# Altium PCB HFM_Can_AX_Eeprom_V1.PcbDoc
Units mil, origin at the board's own origin, x right, y up, seen from the top; angles counter-clockwise.
Board outline 998 x 700 mil, 2 copper layers (Top Layer, Bottom Layer); 15 components, 15 nets, 61 pads, 12 vias.
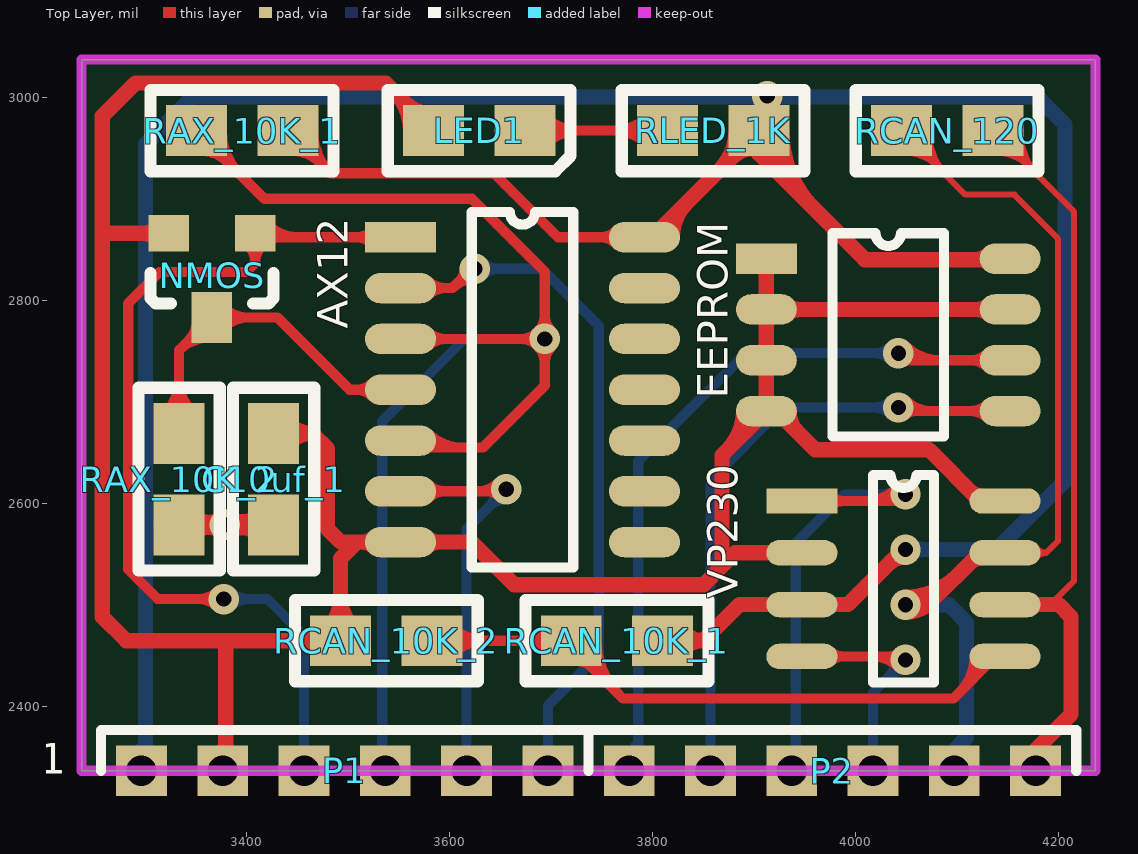
[diagram p0: Top Layer view]
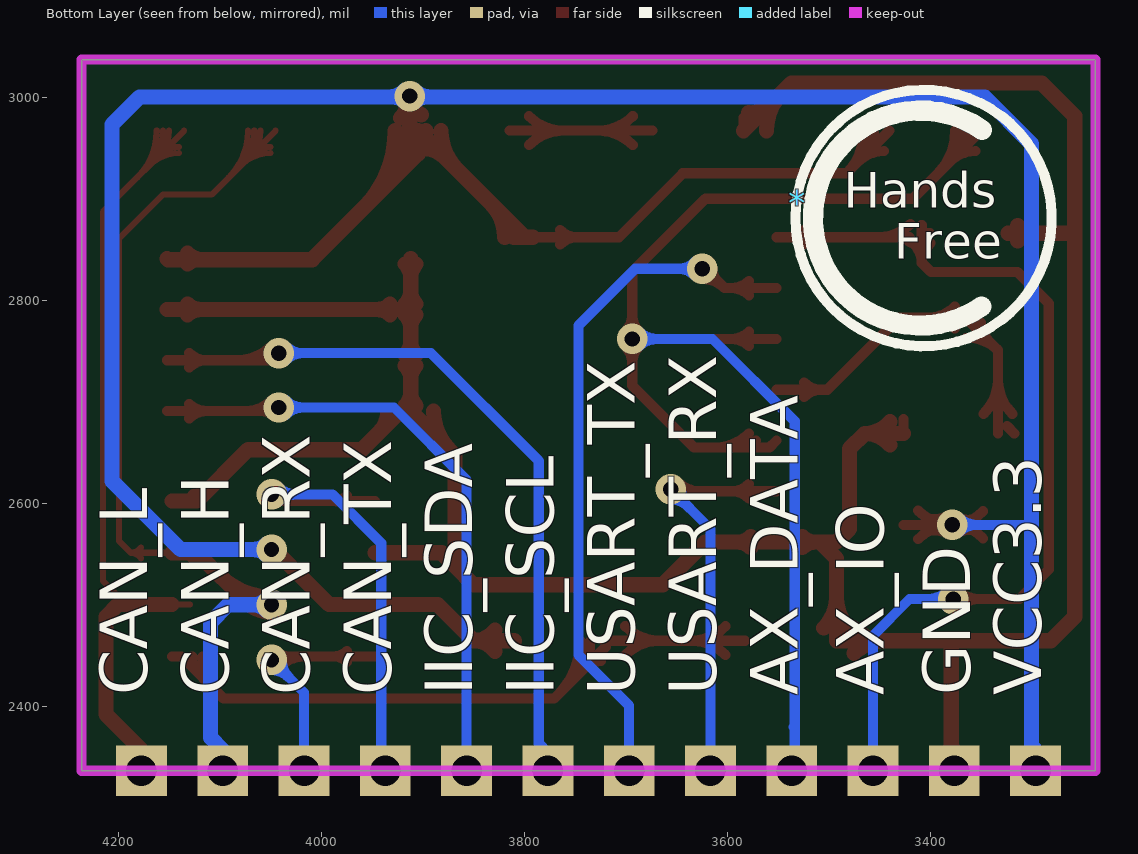
[diagram p1: Bottom Layer view, seen from below]

## Layer stack, top to bottom
Top Layer: signal copper 1.4
Dielectric: dielectric 12.6, FR-4, Dk 4.8
Bottom Layer: signal copper 1.4

## Board outline
3238,2337 4236,2337 4236,3037 3238,3037

## Design rules (kind name [scope] priority, off if disabled: settings)
Clearance [All] p1: gap=8
ComponentClearance [All] p1 off: gap=10 collisioncheckmode=3 verticalgap=10 showdistances=FALSE
Height [All] p1 off: minheight=0 maxheight=1000 prefheight=500
PolygonConnect [All] p1: connectstyle=Relief reliefconductorwidth=10 reliefentries=4 polygonreliefangle="90 Angle"
RoutingVias [All] p1: holewidth=15 width=30 viastyle="Through Hole" minholewidth=15 minwidth=30 maxholewidth=100 maxwidth=200
SilkscreenOverComponentPads [All] p1: minsilkscreentomaskgap=10
SolderMaskExpansion [All] p1: expansion=4
Width [All] p1: maxlimit=100 minlimit=6 preferedwidth=6
25 further rules are at their usual default settings.

## Components (designator, comment, footprint, x,y, rotation, side; value= is the part's Value field where it differs from the comment)
* "MDE_LOGO" MDE_LOGO_Overlay 3531,2896 r180 bottom
AX12 "CHP_74HC126D" CHP_SOP_14P 3552,2862 r0 top
C10uf_1 "ELE_Cap_10uf" ELE_0805_P 3427,2579 r90 top
EEPROM "AT24C02" CHP_SOP_8P 3912,2841 r0 top
LED1 "ELE_LED" ELE_0805极性_P 3674.33,2967 r180 top
NMOS "SIS412DN" CHP_SOT23_P_3P 3409,2866 r180 top
P1 "HDR_Header_1*6" HDR_STAMPHOLE_2.00_DH_1*6 3697,2337 r180 top
P2 "HDR_Header_1*6" HDR_STAMPHOLE_2.00_DH_1*6 4177,2337 r180 top
RAX_10K_1 "Res2" ELE_0805_P 3351,2967 r0 top
RAX_10K_2 "ELE_RES_1" ELE_0805_P 3334,2579 r90 top
RCAN_10K_1 "ELE_RES_1" ELE_0805_P 3810,2465 r180 top
RCAN_10K_2 "ELE_RES_1" ELE_0805_P 3583,2465 r180 top
RCAN_120 "ELE_RES_1" ELE_0805_P 4045,2967 r0 top
RLED_1K "ELE_RES_1" ELE_0805_P 3814.67,2967 r0 top
VP230 "CHP_VP230_P" CHP_VP230_P 3947,2602.5 r0 top

## Footprints (in the part's own frame and the unit in brackets; to place one, negate y for a bottom-side part, rotate by r counter-clockwise, add the part's x,y. Pads: shape width x height; smd on the part's side, far side on the other; paste and mask are expansions set on the pad)
CHP_SOP_8P [mil]
  rect 60x30 smd: 1(0,0)
  oval 60x30 smd: 2(0,-50) 3(0,-100) 4(0,-150) 5(240,-150) 6(240,-100) 7(240,-50) 8(240,0)
  silkscreen extent 65,-175 175,25
CHP_SOP_14P [mil]
  rect 70x30 smd: 1(0,0)
  oval 70x30 smd: 2(0,-50) 3(0,-100) 4(0,-150) 5(0,-200) 6(0,-250) 7(0,-300) 8(240,-300) 9(240,-250) 10(240,-200) 11(240,-150) 12(240,-100) 13(240,-50) 14(240,0)
  silkscreen extent 70,-325 170,25
CHP_SOT23_P_3P [mil]
  rect 40x36 smd: 1(0,0) 2(85,0)
  rect 40x50 smd: 3(43,83)
  silkscreen extent -18,39 103,69
CHP_VP230_P [mil]
  rect 70x25 smd: 1(0,0)
  oval 70x25 smd: 2(0,-51) 3(0,-102) 4(0,-153) 5(200,-153) 6(200,-102) 7(200,-51) 8(200,0)
  silkscreen extent 70,-178 130,26
ELE_0805_P [mil]
  rect 60x50 smd: 1(0,0) 2(90,0)
  silkscreen extent -45,-40 135,40
ELE_0805极性_P [mil]
  rect 60x50 smd: 1(0,0) 2(90,0)
  silkscreen extent -45,-40 135,40
HDR_STAMPHOLE_2.00_DH_1*6 [mil]
  rect 50x50 hole 30: 1(0,0) 2(80,0) 3(160,0) 4(240,0) 5(320,0) 6(400,0)
  Keep-Out Layer lines w10: 440,0 -40,0
  silkscreen extent -40,-40 440,0
MDE_LOGO_Overlay [mil]
  silkscreen extent -2,-141 250,111

## Part data
AX12: "4Â·ÈýÌ"
C10uf_1: "电容10uf"
EEPROM: library part CHP_AT24C0X, "Polarized Capacitor (Radial)"
LED1: "·"
NMOS: library part ELE_NMOS_1, "MOS管"
RAX_10K_1: "Resistor"
RAX_10K_2 RCAN_10K_1 RCAN_10K_2 RCAN_120 RLED_1K: "电?"

## Via types
v1: diameter 30, hole 15, Top Layer to Bottom Layer, 12 vias

## Nets (pads, with @x,y where several pads share a name; then routed paths per layer and width w, separated by ;. In a path a pad name is that pad's centre, name@x,y a point inside that pad or via, vN(x,y) a via of type N, cw(c..) or ccw(c..) an arc to the next point about the centre after c; other vN are vias at no path point)
AX_DATA: AX12.3 AX12.5 P1.3 RAX_10K_1.1 | length 1723.8
  Top Layer w10: RAX_10K_1.1@3348,2964 RAX_10K_1.1 3418,2900 3622,2900 3694,2828 v1(3694,2762) ; RAX_10K_1.1@3356,2947 cw(c3356,2910.79) 3381.61,2936.39 ; RAX_10K_1.1@3366,2967 ccw(c3402.21,2967) 3376.61,2941.39 ; RAX_10K_1.1@3376,2967 ccw(c3436.36,2967) 3393.68,2924.32 ; AX12.5 3559,2655 3633,2655 3694,2716 v1(3694,2762) ; AX12.3 v1(3694,2762) ; AX12.5@3572,2662 ccw(c3588.9,2678.9) 3588.9,2655 ; AX12.5@3579.07,2669.07 ccw(c3613.04,2703.04) 3613.04,2655 ; AX12.3@3579.07,2754.93 cw(c3596.14,2737.86) 3596.14,2762 cw(c3596.14,2786.14) AX12.3@3579.07,2769.07 ; v1@3701.07,2754.93 ccw(c3718.14,2737.86) 3694,2737.86 ccw(c3669.86,2737.86) 3686.93,2754.93 ccw(c3669.86,2737.86) 3669.86,2762 ccw(c3669.86,2786.14) 3686.93,2769.07 ccw(c3669.86,2786.14) 3694,2786.14 ccw(c3718.14,2786.14) v1@3701.07,2769.07
  Bottom Layer w10: P1.3@3534,2354 P1.3@3537,2351 ; 3535,2380 3534,2381 ; P1.3 3537,2355 3534,2358 3534,2381 ; v1@3686.93,2754.93 ccw(c3669.86,2737.86) 3669.86,2762 ccw(c3669.86,2786.14) v1@3686.93,2769.07 ; v1(3694,2762) 3615,2762 3534,2681 3534,2381
AX_IO: AX12.1 NMOS.1 P1.4 | length 1101.1
  Top Layer w10: v1@3370.93,2498.93 ccw(c3353.86,2481.86) 3353.86,2506 ccw(c3353.86,2530.14) v1@3370.93,2513.07 ; v1(3378,2506) 3313,2506 3284,2535 3284,2797 3315,2828 3400,2828 3409,2837 ; NMOS.1@3400.35,2856.29 cw(c3383.16,2837) 3409,2837 ; NMOS.1@3401,2866 NMOS.1 ; NMOS.1@3409,2874 3409,2837 ; NMOS.1@3417.65,2856.29 ccw(c3434.84,2837) 3409,2837 ; NMOS.1@3420.19,2856.81 cw(c3432.73,2844.27) 3432.73,2862 ; NMOS.1@3420.19,2875.19 ccw(c3452.04,2907.04) 3452.04,2862 ; NMOS.1@3421,2862 AX12.1 ; AX12.1@3524.93,2854.93 ccw(c3507.86,2837.86) 3507.86,2862 ccw(c3507.86,2886.14) AX12.1@3524.93,2869.07
  Bottom Layer w10: v1(3378,2506) 3421,2506 3457,2470 P1.4@3457,2355 ; v1@3385.07,2498.93 cw(c3402.14,2481.86) 3402.14,2506 cw(c3402.14,2530.14) v1@3385.07,2513.07
CAN_H: P2.2 RCAN_120.1 VP230.7 | length 1220.8
  Top Layer w6: RCAN_120.1 4108,2904 4156,2904 4199,2861 4199,2563 4187.5,2551.5 ; RCAN_120.1@4050,2945 cw(c4050,2903.96) 4079.02,2932.98 ; RCAN_120.1@4050,2951 cw(c4050,2924.44) RCAN_120.1@4068.78,2943.22 ; RCAN_120.1@4060,2967 ccw(c4096.21,2967) 4070.61,2941.39 ; RCAN_120.1@4066,2967 ccw(c4116.7,2967) 4080.85,2931.15 ; RCAN_120.1@4072,2967 ccw(c4137.18,2967) 4091.09,2920.91 ; VP230.7 4187.5,2551.5 ; VP230.7@4177.34,2546.14 cw(c4187.5,2539.2) 4187.5,2551.5 ; VP230.7@4177.34,2556.86 ccw(c4187.5,2563.8) 4187.5,2551.5
  Top Layer w15: v1@4049,2492.83 ccw(c4049,2528.64) 4074.32,2503.32 ; v1(4049,2500.33) 4071.33,2500.33 4122.5,2551.5 VP230.7 ; v1@4049,2507.83 ccw(c4049,2579.86) 4099.93,2528.93 ; v1@4054.3,2495.03 cw(c4067.11,2482.23) 4067.11,2500.33 cw(c4067.11,2518.44) v1@4054.3,2505.64 ; 4112.55,2541.55 cw(c4124.5,2529.6) VP230.7@4124.5,2546.5
  Bottom Layer w15: v1(4049,2500.33) 4091.67,2500.33 4109,2483 4109,2369.5 P2.2@4097,2357.5 ; v1@4054.3,2495.03 cw(c4067.11,2482.23) 4067.11,2500.33 cw(c4067.11,2518.44) v1@4054.3,2505.64
CAN_L: P2.1 RCAN_120.2 VP230.6 | length 974.9
  Top Layer w6: VP230.6@4129.5,2500.5 VP230.6 ; RCAN_120.2 4215,2887 4215,2524 4191.5,2500.5 4190,2499 ; RCAN_120.2@4140,2945 cw(c4140,2903.96) 4169.02,2932.98 ; RCAN_120.2@4140,2951 cw(c4140,2924.44) RCAN_120.2@4158.78,2943.22 ; RCAN_120.2@4150,2967 ccw(c4186.21,2967) 4160.61,2941.39 ; RCAN_120.2@4156,2967 ccw(c4206.7,2967) 4170.85,2931.15 ; VP230.6@4161,2499 4190,2499 ; RCAN_120.2@4162,2967 ccw(c4227.18,2967) 4181.09,2920.91 ; VP230.6@4176.22,2493.78 cw(c4188.81,2481.19) 4188.81,2499 ; VP230.6@4177.42,2505.75 ccw(c4190,2514.1) 4190,2499
  Top Layer w15: VP230.6 4191.5,2500.5 4200,2500.5 4212,2488.5 4212,2392.5 P2.1@4177,2357.5
CAN_RX: P2.3 VP230.4 | length 312
  Top Layer w10: VP230.4 4045.5,2449.5 v1(4049,2446) ; VP230.4@3974.8,2444.2 cw(c3987.61,2431.39) 3987.61,2449.5 cw(c3987.61,2467.61) VP230.4@3974.8,2454.8 ; 4016.41,2449.5 cw(c4016.41,2413.41) v1@4041.93,2438.93 ; 4033.31,2449.5 ccw(c4033.31,2461.69) v1@4041.93,2453.07
  Bottom Layer w10: P2.3@4017,2355 4017,2414 v1(4049,2446) ; v1@4039,2446 cw(c4014.86,2446) 4031.93,2428.93 cw(c4049,2411.86) v1@4049,2436
CAN_TX: P2.4 VP230.1 | length 558.2
  Top Layer w10: VP230.1 4037.5,2602.5 v1@4046,2611 ; VP230.1@3974.8,2597.2 cw(c3987.61,2584.39) 3987.61,2602.5 cw(c3987.61,2620.61) VP230.1@3974.8,2607.8 ; 4009.17,2602.5 ccw(c4009.17,2648.83) v1@4041.93,2616.07 ; 4033.31,2602.5 ccw(c4033.31,2624.69) v1(4049,2609)
  Bottom Layer w10: P2.4@3937,2355 3941,2359 3941,2561 3989,2609 v1(4049,2609) ; v1@4041.93,2601.93 ccw(c4024.86,2584.86) 4024.86,2609 ccw(c4024.86,2633.14) v1@4041.93,2616.07
GND: AX12.7 C10uf_1.2 EEPROM.1 EEPROM.2 EEPROM.3 EEPROM.4 EEPROM.7 LED1.2 NMOS.2 P1.5 RCAN_10K_2.2 VP230.2 VP230.8 | length 3533.2
  Top Layer w10: C10uf_1.2 C10uf_1.2@3427,2683 ; LED1.2 LED1.2@3584.33,2979.67
  Top Layer w15: NMOS.2@3314.58,2858.58 ccw(c3296.65,2840.65) 3296.65,2866 ccw(c3296.65,2891.35) NMOS.2@3314.58,2873.42 ; NMOS.2 3259.5,2866 3258.5,2867 ; P1.5@3377,2357.5 3380,2360.5 3380,2465 ; C10uf_1.2 3465,2669 ; C10uf_1.2@3440.3,2657.62 cw(c3465,2636.5) 3465,2669 ; C10uf_1.2@3440.3,2680.38 ccw(c3465,2701.5) 3465,2669 ; RCAN_10K_2.2@3475.63,2452.63 ccw(c3445.75,2422.75) 3445.75,2465 ccw(c3445.75,2507.25) RCAN_10K_2.2@3475.63,2477.37 ; RCAN_10K_2.2@3480.63,2477.37 ccw(c3450.75,2507.25) 3493,2507.25 ccw(c3535.25,2507.25) RCAN_10K_2.2@3505.37,2477.37 ; AX12.7@3526.7,2556.7 ccw(c3513.89,2543.89) 3513.89,2562 ccw(c3513.89,2580.11) AX12.7@3526.7,2567.3 ; 3545.92,3005.41 cw(c3507.51,2967) LED1.2@3561.83,2967 ; 3557.99,2993.34 ccw(c3579.33,3014.68) LED1.2@3579.33,2984.5 ; AX12.7@3577.3,2556.7 cw(c3590.11,2543.89) 3590.11,2562 cw(c3590.11,2580.11) AX12.7@3577.3,2567.3 ; LED1.2 3537.33,3014 3291,3014 3258.5,2981.5 3258.5,2867 ; 3873.59,2652.59 ccw(c3835.18,2691) EEPROM.4@3889.5,2691 ; EEPROM.4@3906.7,2696.3 ccw(c3893.89,2709.11) 3912,2709.11 ccw(c3930.11,2709.11) EEPROM.4@3917.3,2696.3 ; EEPROM.3@3906.7,2735.7 cw(c3893.89,2722.89) 3912,2722.89 cw(c3930.11,2722.89) EEPROM.3@3917.3,2735.7 ; EEPROM.3@3906.7,2746.3 ccw(c3893.89,2759.11) 3912,2759.11 ccw(c3930.11,2759.11) EEPROM.3@3917.3,2746.3 ; EEPROM.2@3906.7,2785.7 cw(c3893.89,2772.89) 3912,2772.89 cw(c3930.11,2772.89) EEPROM.2@3917.3,2785.7 ; EEPROM.2@3906.7,2796.3 ccw(c3893.89,2809.11) 3912,2809.11 ccw(c3930.11,2809.11) EEPROM.2@3917.3,2796.3 ; EEPROM.1@3906.7,2835.7 cw(c3893.89,2822.89) 3912,2822.89 cw(c3930.11,2822.89) EEPROM.1@3917.3,2835.7 ; EEPROM.1 EEPROM.2 ; EEPROM.2@3932.3,2785.7 cw(c3945.11,2772.89) 3945.11,2791 cw(c3945.11,2809.11) EEPROM.2@3932.3,2796.3 ; EEPROM.4@3934.5,2691 ccw(c3964.68,2691) 3943.34,2669.66 ; VP230.2 3881.5,2551.5 3868.5,2538.5 ; 4112.55,2612.45 ccw(c4124.5,2624.4) VP230.8@4124.5,2607.5 ; EEPROM.7@4131.7,2785.7 ccw(c4118.89,2772.89) 4118.89,2791 ccw(c4118.89,2809.11) EEPROM.7@4131.7,2796.3 ; VP230.8 4122.5,2602.5 4072,2653 3960,2653 3922,2691 EEPROM.4 ; EEPROM.7 EEPROM.2 ; 3258.5,2867 3258.5,2488.5 3282,2465 3380,2465 ; 3380,2465 RCAN_10K_2.2 3493,2546 3509,2562 ; 3465,2669 3480,2654 3480,2575 3493,2562 3509,2562 ; 3509,2562 AX12.7 3622,2562 3664,2520 3850,2520 3868.5,2538.5 ; 3868.5,2538.5 3868.5,2647.5 EEPROM.4 ; EEPROM.4 EEPROM.3 EEPROM.2
I2C_SCL: EEPROM.6 P2.6 | length 833
  Top Layer w10: v1@4042,2741 EEPROM.6 ; v1(4042,2748) ccw(c4058.9,2764.9) 4058.9,2741 ; v1@4049.07,2755.07 ccw(c4083.04,2789.04) 4083.04,2741 ; EEPROM.6@4129.93,2733.93 ccw(c4112.86,2716.86) 4112.86,2741 ccw(c4112.86,2765.14) EEPROM.6@4129.93,2748.07
  Bottom Layer w10: P2.6@3777,2355 3786,2364 3786,2642 3892,2748 v1(4042,2748) ; v1@4034.93,2740.93 ccw(c4017.86,2723.86) 4017.86,2748 ccw(c4017.86,2772.14) v1@4034.93,2755.07
I2C_SDA: EEPROM.5 P2.5 | length 706.4
  Top Layer w10: v1@4042,2691 EEPROM.5 ; v1@4049.07,2687.43 cw(c4057.69,2678.81) 4057.69,2691 ; v1@4049.07,2701.57 ccw(c4074.59,2727.09) 4074.59,2691 ; EEPROM.5@4129.93,2683.93 ccw(c4112.86,2666.86) 4112.86,2691 ccw(c4112.86,2715.14) EEPROM.5@4129.93,2698.07
  Bottom Layer w10: P2.5@3857,2355 3857,2623 3928.5,2694.5 v1(4042,2694.5) ; v1@4034.93,2687.43 ccw(c4017.86,2670.36) 4017.86,2694.5 ccw(c4017.86,2718.64) v1@4034.93,2701.57
NetAX12_4: AX12.4 NMOS.3 RAX_10K_2.2 | length 576.6
  Top Layer w10: RAX_10K_2.2@3318,2669 RAX_10K_2.2@3325,2676 ; RAX_10K_2.2@3319.86,2688.14 ccw(c3285.72,2722.28) 3334,2722.28 ccw(c3382.28,2722.28) RAX_10K_2.2@3348.14,2688.14 ; RAX_10K_2.2 3334,2751 ; 3343.93,2760.93 ccw(c3326.86,2778) NMOS.3@3351,2778 ; NMOS.3@3365.24,2763.02 ccw(c3363.14,2721.86) 3334,2751 ; NMOS.3@3376.61,2772.39 cw(c3402.21,2746.79) 3402.21,2783 cw(c3402.21,2819.21) NMOS.3@3376.61,2793.61 ; AX12.4@3524.93,2704.93 ccw(c3507.86,2687.86) 3507.86,2712 ccw(c3507.86,2736.14) AX12.4@3524.93,2719.07 ; AX12.4 3502,2712 3431,2783 NMOS.3 3334,2751
NetLED1_1: LED1.1 RLED_1K.1 | length 292
  Top Layer w10: LED1.1 RLED_1K.1 ; LED1.1@3693.48,2952.86 cw(c3727.62,2918.72) 3727.62,2967 cw(c3727.62,3015.28) LED1.1@3693.48,2981.14 ; RLED_1K.1@3795.52,2952.86 ccw(c3761.38,2918.72) 3761.38,2967 ccw(c3761.38,3015.28) RLED_1K.1@3795.52,2981.14
NetRCAN_10K_1_2: RCAN_10K_1.2 RCAN_10K_2.1 VP230.5 | length 934.4
  Top Layer w10: RCAN_10K_2.1 RCAN_10K_1.2 3720,2459 3771,2408 4096,2408 4137.5,2449.5 VP230.5 ; RCAN_10K_2.1@3602.14,2450.86 cw(c3636.28,2416.72) 3636.28,2465 cw(c3636.28,2513.28) RCAN_10K_2.1@3602.14,2479.14 ; RCAN_10K_1.2@3700.86,2450.86 ccw(c3666.72,2416.72) 3666.72,2465 ccw(c3666.72,2513.28) RCAN_10K_1.2@3700.86,2479.14 ; RCAN_10K_1.2@3725,2445 cw(c3725,2423.27) 3740.36,2438.64 ; RCAN_10K_1.2@3735,2465 ccw(c3785.7,2465) 3749.85,2429.15 ; RCAN_10K_1.2@3745,2465 ccw(c3819.84,2465) 3766.92,2412.08 ; 4102.5,2414.5 ccw(c4067.51,2449.5) VP230.5@4117,2449.5 ; 4119.58,2431.58 ccw(c4101.65,2449.5) VP230.5@4127,2449.5
USART_RX: AX12.6 P1.2 | length 493.7
  Top Layer w10: AX12.6 3654,2612 v1(3656,2614) ; AX12.6@3579.07,2604.93 cw(c3596.14,2587.86) 3596.14,2612 cw(c3596.14,2636.14) AX12.6@3579.07,2619.07 ; 3627.03,2612 ccw(c3627.03,2642.97) v1@3648.93,2621.07 ; 3636.69,2612 cw(c3636.69,2594.69) v1@3648.93,2606.93
  Bottom Layer w10: P1.2@3617,2355 3617,2575 v1(3656,2614) ; v1@3646,2614 cw(c3621.86,2614) 3638.93,2596.93 cw(c3656,2579.86) v1@3656,2604
USART_TX: AX12.2 P1.1 | length 787.1
  Top Layer w10: AX12.2 3603,2812 ; AX12.2@3579.07,2804.93 cw(c3596.14,2787.86) 3596.14,2812 cw(c3596.14,2836.14) AX12.2@3579.07,2819.07 ; 3610.05,2819.05 ccw(c3598.1,2831) v1@3615,2831 ; v1@3624.93,2821 ccw(c3624.73,2790.27) 3603,2812 ; v1@3629,2838 3603,2812
  Bottom Layer w10: v1(3625,2831) 3691,2831 3747,2775 3747,2451 3697,2401 P1.1@3697,2355 ; v1@3632.07,2823.93 cw(c3649.14,2806.86) 3649.14,2831 cw(c3649.14,2855.14) v1@3632.07,2838.07
VCCIC: AX12.14 C10uf_1.1 EEPROM.8 P1.6 RAX_10K_1.2 RAX_10K_2.1 RCAN_10K_1.1 RLED_1K.2 VP230.3 | length 4518.2
  Top Layer w10: RAX_10K_2.1 v1(3379,2579) ; RAX_10K_2.1@3348.85,2565.6 cw(c3379,2538.38) v1(3379,2579) ; RAX_10K_2.1@3348.85,2592.4 ccw(c3379,2619.62) v1(3379,2579) ; v1@3369.87,2574.91 ccw(c3354.26,2567.92) 3358.69,2584.44 ccw(c3363.12,2600.97) v1@3373.14,2587.1 ; v1@3369.87,2583.09 cw(c3354.26,2590.08) 3358.69,2573.56 cw(c3363.12,2557.03) v1@3373.14,2570.9 ; v1@3371.93,2571.93 ccw(c3354.86,2554.86) 3354.86,2579 ccw(c3354.86,2603.14) v1@3371.93,2586.07 ; v1@3384,2570.34 cw(c3396.07,2549.43) 3402.32,2572.75 cw(c3408.57,2596.07) v1@3387.66,2584 ; v1@3384,2587.66 ccw(c3396.07,2608.57) 3402.32,2585.25 ccw(c3408.57,2561.93) v1@3387.66,2574 ; v1@3386.07,2571.93 cw(c3403.14,2554.86) 3403.14,2579 cw(c3403.14,2603.14) v1@3386.07,2586.07 ; C10uf_1.1@3412.8,2564.92 ccw(c3379,2531.41) v1(3379,2579) ; C10uf_1.1@3412.8,2593.08 cw(c3379,2626.59) v1(3379,2579) ; C10uf_1.1 v1(3379,2579) ; RAX_10K_1.2 3483,2925 ; RAX_10K_1.2@3446,2947 cw(c3446,2910.79) 3471.61,2936.39 ; RAX_10K_1.2@3456,2966.88 ccw(c3490.89,2966.46) 3466.22,2941.78 ; RAX_10K_1.2@3466,2966.76 ccw(c3524.05,2966.05) 3483,2925 ; 3644.5,2924.5 3707,2862 AX12.14 ; 3644.5,2925 3483,2925 ; AX12.14@3764.93,2854.93 ccw(c3747.86,2837.86) 3747.86,2862 ccw(c3747.86,2886.14) AX12.14@3764.93,2869.07
  Top Layer w15: AX12.14 AX12.14@3799.67,2862 ; RCAN_10K_1.1 3850,2465 ; AX12.14@3810.67,2862 AX12.14@3799.67,2862 ; AX12.14@3819.5,2862 cw(c3867.38,2862) 3833.52,2895.86 ; RCAN_10K_1.1@3829,2454.5 cw(c3850,2438.75) 3850,2465 ; RCAN_10K_1.1@3829,2475.5 ccw(c3850,2491.25) 3850,2465 ; 3866.26,2928.59 ccw(c3827.85,2967) RLED_1K.2@3882.17,2967 ; 3878.33,2940.66 cw(c3899.67,2919.32) RLED_1K.2@3899.67,2949.5 ; RLED_1K.2@3897.17,2967 ccw(c3933.78,2967) 3907.89,2941.11 ; RLED_1K.2@3901.72,2982.59 ccw(c3892.34,3001) v1(3913,3001) ; RLED_1K.2 AX12.14@3799.67,2862 ; v1@3907.7,2995.7 cw(c3894.89,2982.89) 3913,2982.89 cw(c3931.11,2982.89) v1@3918.3,2995.7 ; v1@3909.95,2994.15 cw(c3904.77,2982.51) 3917.07,2985.81 cw(c3929.37,2989.11) v1@3919.07,2996.59 ; RLED_1K.2@3912.17,2967 ccw(c3985,2967) 3933.5,2915.5 ; RLED_1K.2@3921.99,2979.43 cw(c3943.38,3001) v1(3913,3001) ; RLED_1K.2@3927.17,2967 ccw(c4036.21,2967) 3959.1,2889.9 ; 4032.21,2540.21 cw(c4049,2523.43) v1@4049,2547.17 ; v1(4049,2554.67) 4046.67,2554.67 3992.5,2500.5 VP230.3 3885.5,2500.5 3850,2465 ; 4116.48,2840 ccw(c4116.48,2861.52) EEPROM.8@4131.7,2846.3 ; 4121.31,2840 cw(c4121.31,2825.31) EEPROM.8@4131.7,2835.7 ; EEPROM.8 4151,2840 4009,2840 3904.67,2944.33 3904.67,2954 3913,2962.33 v1(3913,3001)
  Bottom Layer w10: 3301,2577 3303,2579 v1(3379,2579) ; v1@3371.93,2571.93 ccw(c3354.86,2554.86) 3354.86,2579 ccw(c3354.86,2603.14) v1@3371.93,2586.07
  Bottom Layer w15: P1.6@3297,2357.5 3301,2361.5 3301,2577 3301,2954 3347,3000 4179,3000 4206,2973 4206,2622 4138.67,2554.67 v1(4049,2554.67) ; 3892.48,3000 ccw(c3892.48,3021.52) v1@3907.7,3006.3 ; 3897.31,3000 cw(c3897.31,2985.31) v1@3907.7,2995.7 ; v1@3918.3,2995.7 cw(c3928.69,2985.31) 3928.69,3000 ; v1@3918.3,3006.3 ccw(c3933.52,3021.52) 3933.52,3000 ; v1@4054.3,2549.36 cw(c4067.11,2536.56) 4067.11,2554.67 cw(c4067.11,2572.77) v1@4054.3,2559.97
pads on no net: AX12.8 AX12.9 AX12.10 AX12.11 AX12.12 AX12.13

## Keep-outs
Keep-Out Layer:
  the board outline again, w10

## Silkscreen, mask and mechanical layers (free items; w line width, h text height)
Bottom Overlay:
  text "VCC3.3" at 3276,2411.16 h80 r270
  text "GND" at 3346,2411.16 h80 r270
  text "AX_IO" at 3431,2411.16 h80 r270
  text "AX_DATA" at 3516,2411.16 h80 r270
  text "USART_RX" at 3596,2411.16 h80 r270
  text "USART_TX" at 3676,2411.16 h80 r270
  text "IIC_SCL" at 3756,2411.16 h80 r270
  text "IIC_SDA" at 3836,2411.16 h80 r270
  text "CAN_TX" at 3916,2411.16 h80 r270
  text "CAN_RX" at 3996,2411.16 h80 r270
  text "CAN_H" at 4076,2411.16 h80 r270
  text "CAN_L" at 4156,2411.16 h80 r270

## Dimensions
4236,2337 to 4177,2337 on Top Overlay
3617,2337 to 3697,2337 on Top Overlay
3238,3037 to 4236,3037 on Top Overlay
3238,2337 to 3297,2337 on Top Overlay
4238,2336 to 4238,3036 on Top Overlay

## Text inside footprints (layer, text, board x,y; h text height)
*: Bottom Overlay "Hands" at 3486,2891 h35; Bottom Overlay "Free" at 3436,2841 h35